# Altium PCB DONUt_v0.0.PcbDoc (part 1 of 2)
Units mm, origin at the board's own origin, x right, y up, seen from the top; angles counter-clockwise.
Board outline 170 x 70 mm, 2 copper layers (Top Layer, Bottom Layer); 266 components, 203 nets, 883 pads, 488 vias.
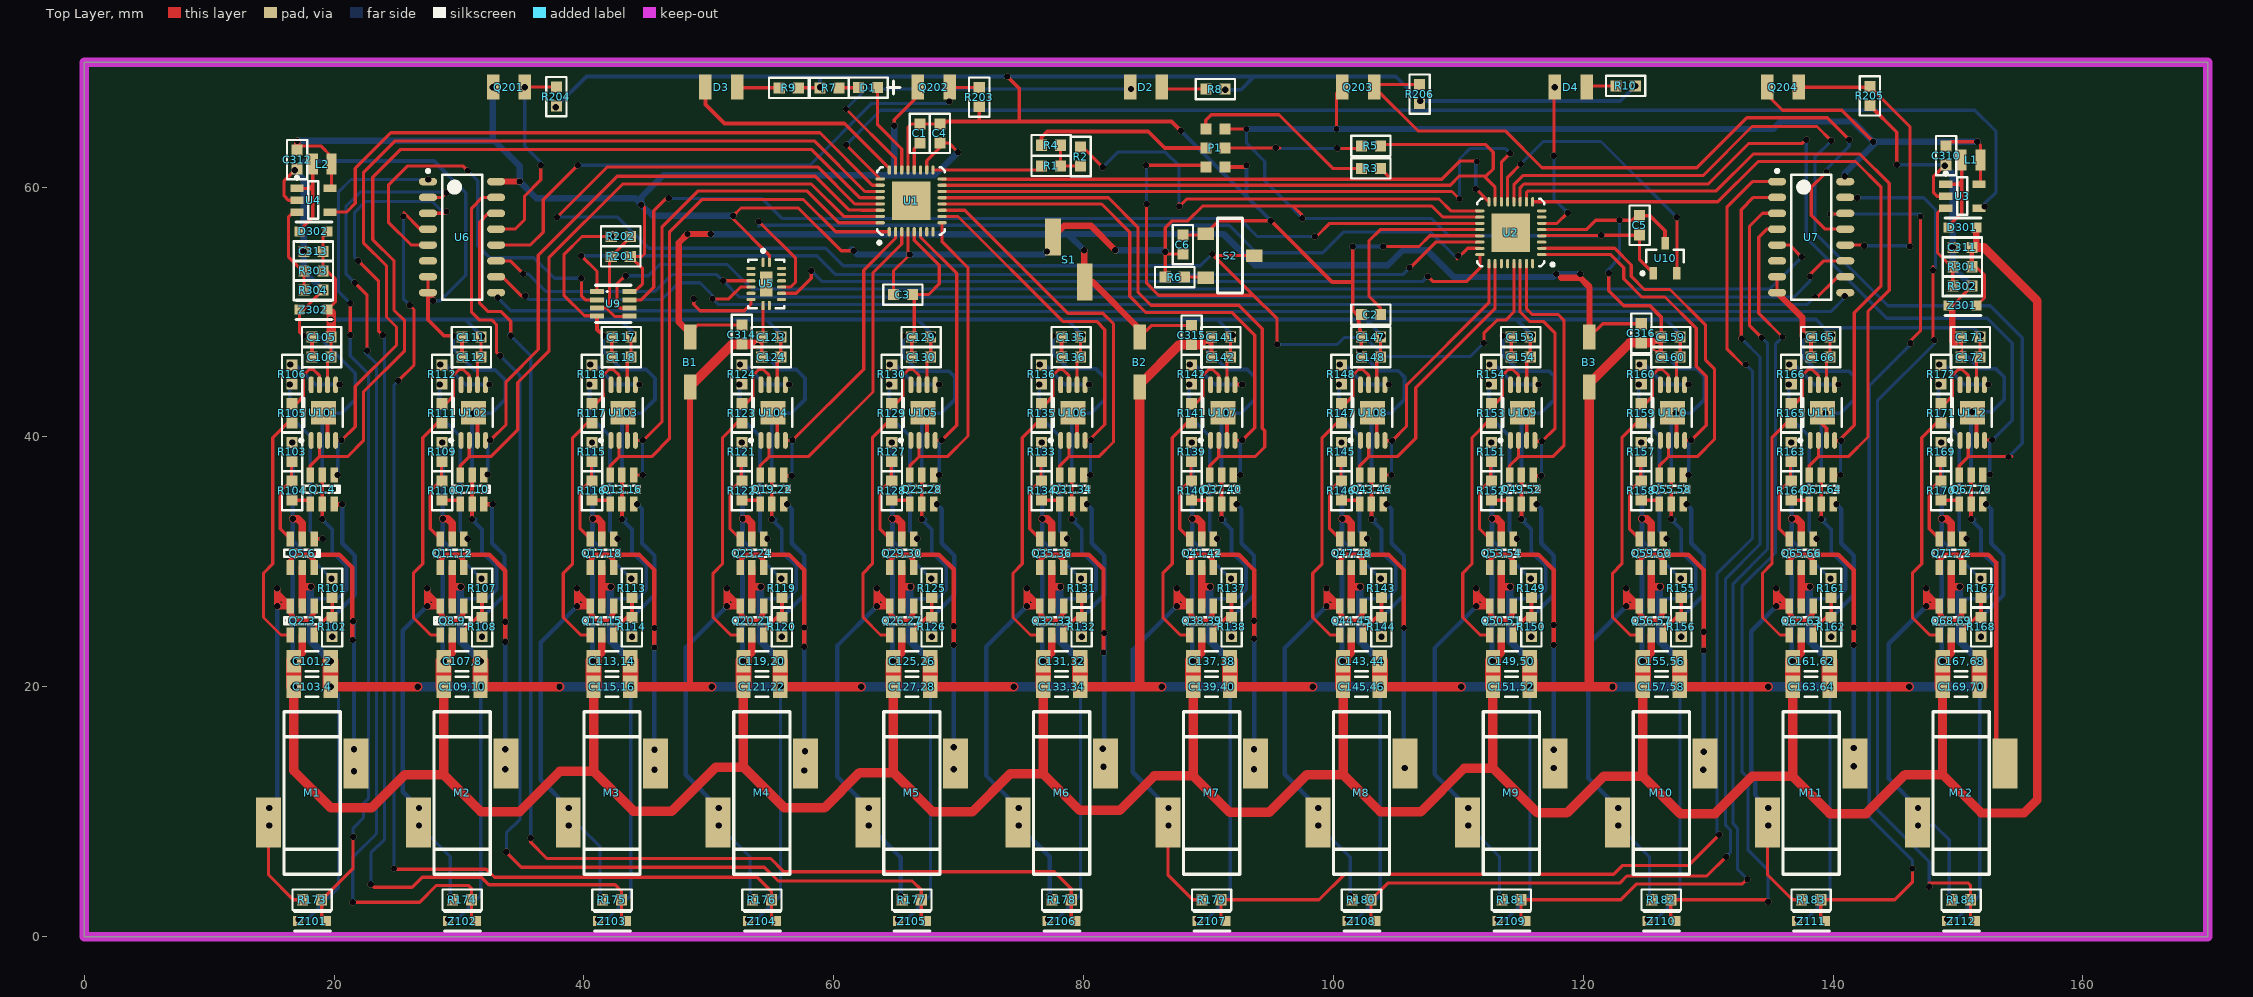
[diagram p0: Top Layer view]
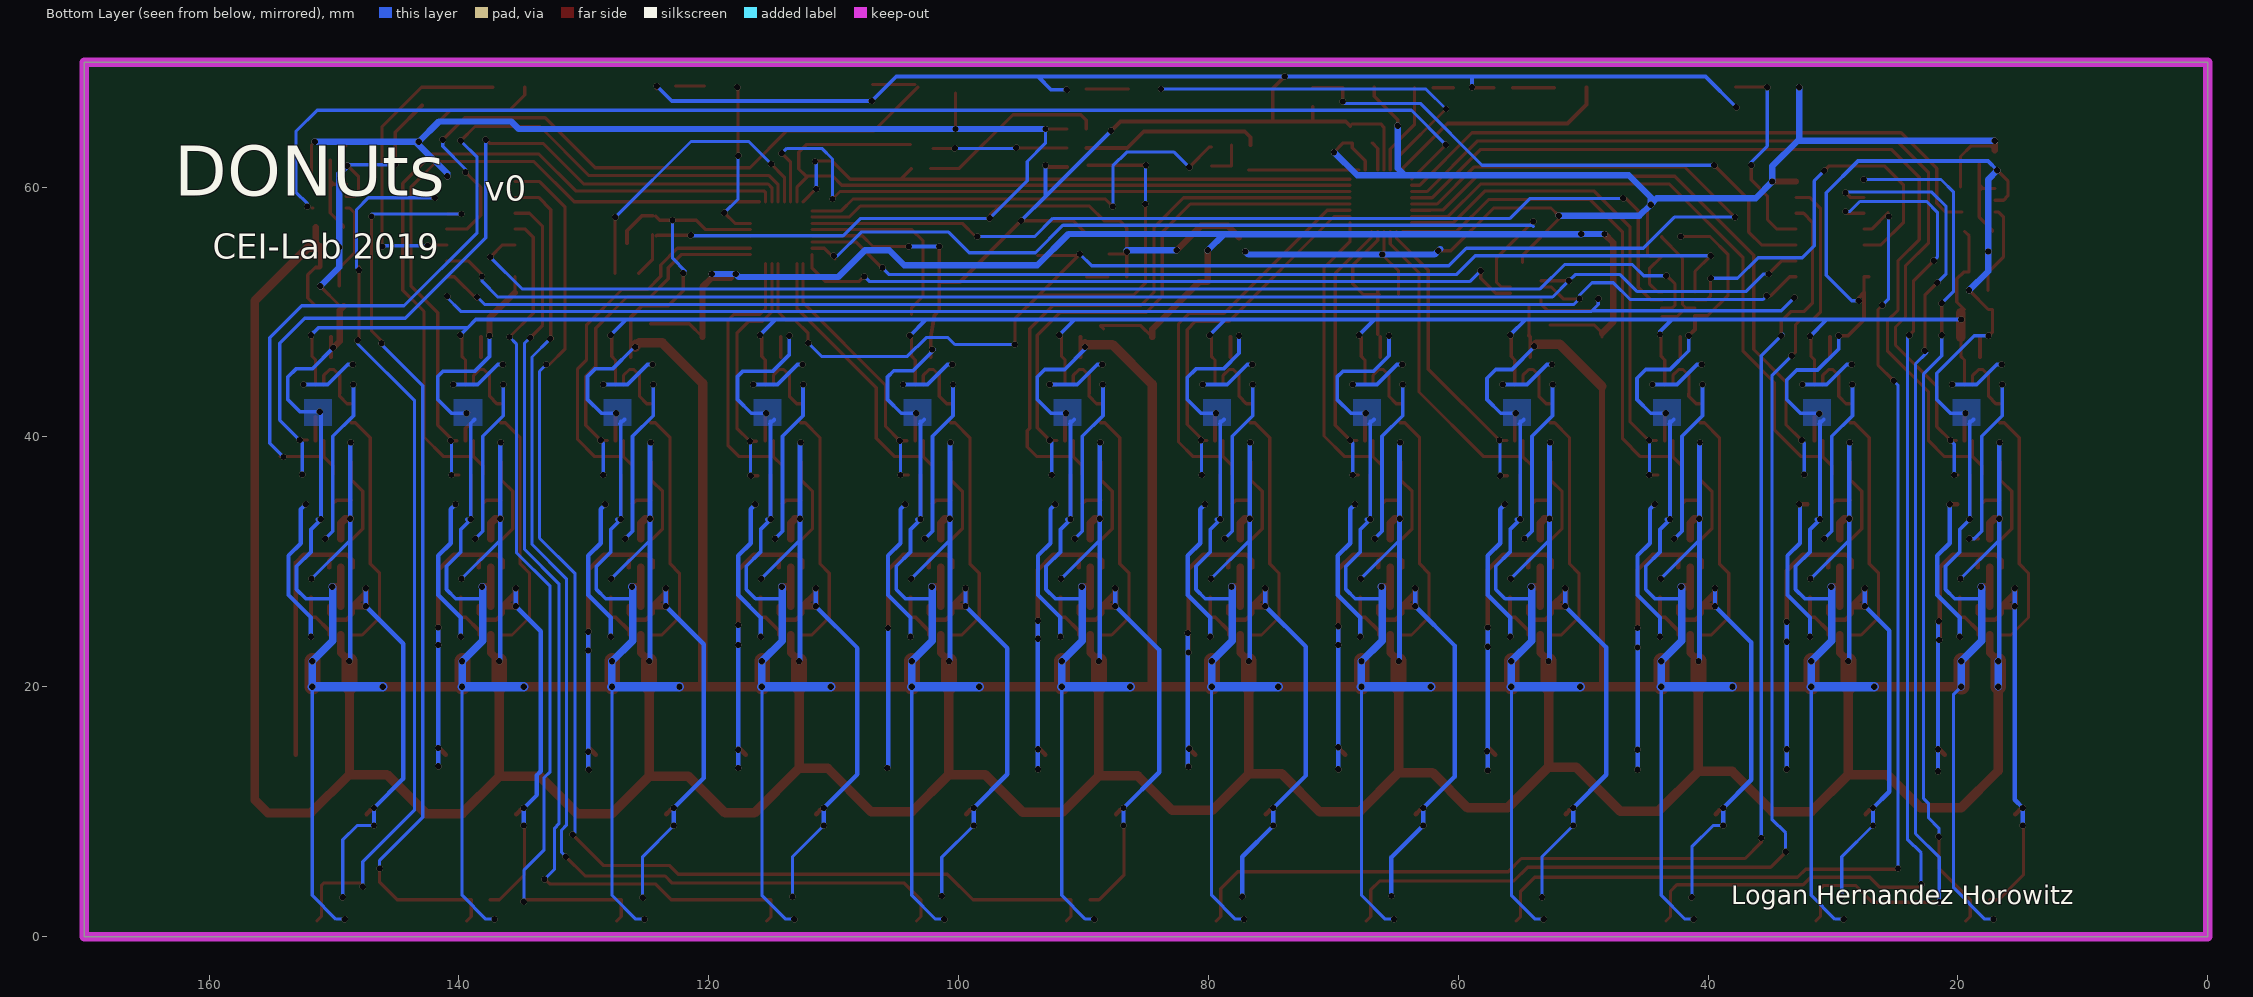
[diagram p1: Bottom Layer view, seen from below]
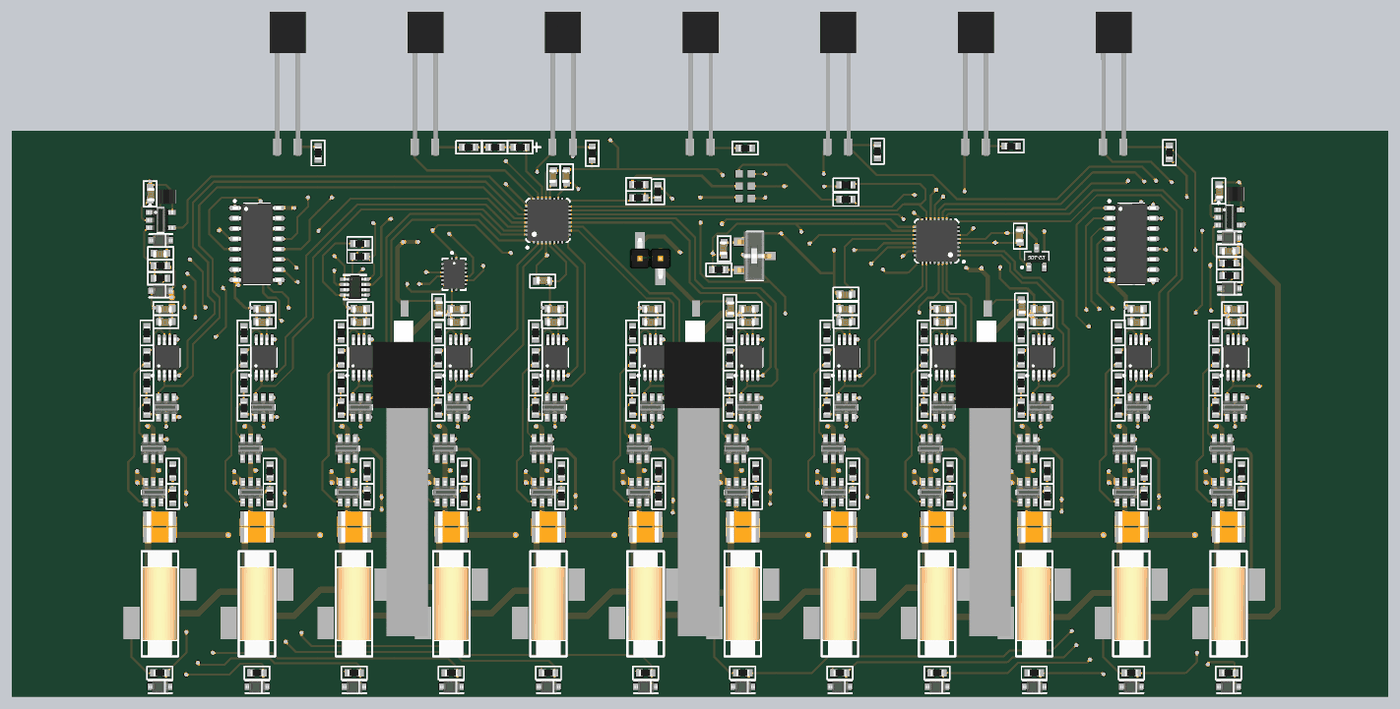
[diagram p3: 3D render of the assembled board from above, using the file's embedded part models]

## Layer stack, top to bottom
Top Solder: solder mask 0.0102, Solder Resist, Dk 3.5
Top Layer: signal copper 0.0356
Dielectric 1: dielectric 0.32, FR-4, Dk 4.8
Bottom Layer: signal copper 0.0356
Bottom Solder: solder mask 0.0102, Solder Resist, Dk 3.5

## Board outline
0,0 0,70 170,70 170,0

## Design rules (kind name [scope] priority, off if disabled: settings)
Clearance [All] p1: gap=0.254 ignorepadtopadclearanceinfootprint=FALSE except(0: Arc-Hole Track-Hole SMDPad-Hole THPad-Hole Via-Hole Fill-Hole Poly-Hole Region-Hole Text-Hole; 0.203: SMDPad-SMDPad; 0.229: Arc-Arc Arc-Track Arc-SMDPad Track-Track Track-SMDPad)
MinimumSolderMaskSliver [All] p1 off: minsoldermaskwidth=0.254
PolygonConnect [All] p1: connectstyle=Direct reliefconductorwidth=0.254 reliefentries=4 polygonreliefangle="90 Angle" airgapwidth=0.254
RoutingVias [All] p1: holewidth=0.711 width=1.27 viastyle="Through Hole" minholewidth=0.711 minwidth=1.27 maxholewidth=0.711 maxwidth=1.27
SilkToSilkClearance [All] p1 off: silktosilkclearance=0.254
SilkToSolderMaskClearance [IsPad] p1 off: minsilkscreentomaskgap=0.254 clearancetoexposedcopper=TRUE
SolderMaskExpansion [All] p1: expansion=0.102
Width [All] p1: maxlimit=1.27 minlimit=0.203 preferedwidth=0.254 minimp=50.000000 maximp=50.000000 favimp=50.000000
27 further rules are at their usual default settings.

## Classes and differential pairs
component class U_comm_sensing: Q201 Q202 Q203 Q204 R201 R202 R203 R204 R205 R206 U5 U6 U7 U9
component class U_epm_control_2: C137,38 C139,40 C141 C142 C143,44 C145,46 C147 C148 C149,50 C151,52 C153 C154 C155,56 C157,58 C159 C160 C161,62 C163,64 C165 C166 C167,68 C169,70 C171 C172 M7 M8 M9 M10 M11 M12 Q37,40 Q38,39 Q41,42 Q43,46 Q44,45 Q47,48 Q49,52 Q50,51 Q53,54 Q55,58 Q56,57 Q59,60 Q61,64 Q62,63 Q65,66 Q67,70 Q68,69 Q71,72 R137 R138 R139 R140 R141 R142 R143 R144 R145 R146 R147 R148 R149 R150 R151 R152 R153 R154 R155 R156 R157 R158 R159 R160 R161 R162 R163 R164 R165 R166 R167 R168 R169 R170 R171 R172 R179 R180 R181 R182 R183 R184 U107 U108 U109 U110 U111 U112 Z107 Z108 Z109 Z110 Z111 Z112
component class U_uC: C1 C2 C3 C4 C5 C6 D1 D2 D3 D4 P1 R1 R2 R3 R4 R5 R6 R7 R8 R9 R10 S2 U1 U2 U10
component class U_power: B1 B2 B3 C310 C311 C312 C313 C314 C315 C316 D301 D302 L1 L2 R301 R302 R303 R304 S1 U3 U4 Z301 Z302
component class U_epm_control_1: C101,2 C103,4 C105 C106 C107,8 C109,10 C111 C112 C113,14 C115,16 C117 C118 C119,20 C121,22 C123 C124 C125,26 C127,28 C129 C130 C131,32 C133,34 C135 C136 M1 M2 M3 M4 M5 M6 Q1,4 Q2,3 Q5,6 Q7,10 Q8,9 Q11,12 Q13,16 Q14,15 Q17,18 Q19,22 Q20,21 Q23,24 Q25,28 Q26,27 Q29,30 Q31,34 Q32,33 Q35,36 R101 R102 R103 R104 R105 R106 R107 R108 R109 R110 R111 R112 R113 R114 R115 R116 R117 R118 R119 R120 R121 R122 R123 R124 R125 R126 R127 R128 R129 R130 R131 R132 R133 R134 R135 R136 R173 R174 R175 R176 R177 R178 U101 U102 U103 U104 U105 U106 Z101 Z102 Z103 Z104 Z105 Z106

## Components (designator, comment, footprint, x,y, rotation, side; value= is the part's Value field where it differs from the comment)
B1 "Batt" BATT_PADS 48.5,46 r0 top locked
B2 "Batt" BATT_PADS 84.5,46 r0 top locked
B3 "Batt" BATT_PADS 120.5,46 r0 top locked
C1 "Cap" SMD0603_cap 66.895,64.3 r270 top value=100n
C2 "Cap" SMD0603_cap 103,49.8 r0 top value=100n
C3 "Cap" SMD0603_cap 65.544,51.4 r180 top value=100n
C4 "Cap" SMD0603_cap 68.495,64.3 r270 top value=100n
C5 "Cap" SMD0603_cap 124.512,56.95 r270 top value=100n
C6 "Cap" SMD0603_cap 87.95,55.4 r270 top value=100n
C101,2 "Dicap" dicap_smd_1206 18.25,22.05 r180 top value=22u
C103,4 "Dicap" dicap_smd_1206 18.25,20 r180 top value=22u
C105 "Cap" SMD0603_cap 19,48 r0 top value=100n
C106 "Cap" SMD0603_cap 19,46.4 r0 top value=4.7u
C107,8 "Dicap" dicap_smd_1206 30.25,22.05 r180 top value=22u
C109,10 "Dicap" dicap_smd_1206 30.25,20 r180 top value=22u
C111 "Cap" SMD0603_cap 31,48 r0 top value=100n
C112 "Cap" SMD0603_cap 31,46.4 r0 top value=4.7u
C113,14 "Dicap" dicap_smd_1206 42.25,22.05 r180 top value=22u
C115,16 "Dicap" dicap_smd_1206 42.25,20 r180 top value=22u
C117 "Cap" SMD0603_cap 43,48 r0 top value=100n
C118 "Cap" SMD0603_cap 43,46.4 r0 top value=4.7u
C119,20 "Dicap" dicap_smd_1206 54.25,22.05 r180 top value=22u
C121,22 "Dicap" dicap_smd_1206 54.25,20 r180 top value=22u
C123 "Cap" SMD0603_cap 55,48 r0 top value=100n
C124 "Cap" SMD0603_cap 55,46.4 r0 top value=4.7u
C125,26 "Dicap" dicap_smd_1206 66.25,22.05 r180 top value=22u
C127,28 "Dicap" dicap_smd_1206 66.25,20 r180 top value=22u
C129 "Cap" SMD0603_cap 67,48 r0 top value=100n
C130 "Cap" SMD0603_cap 67,46.4 r0 top value=4.7u
C131,32 "Dicap" dicap_smd_1206 78.25,22.05 r180 top value=22u
C133,34 "Dicap" dicap_smd_1206 78.25,20 r180 top value=22u
C135 "Cap" SMD0603_cap 79,48 r0 top value=100n
C136 "Cap" SMD0603_cap 79,46.4 r0 top value=4.7u
C137,38 "Dicap" dicap_smd_1206 90.25,22.05 r180 top value=22u
C139,40 "Dicap" dicap_smd_1206 90.25,20 r180 top value=22u
C141 "Cap" SMD0603_cap 91,48 r0 top value=100n
C142 "Cap" SMD0603_cap 91,46.4 r0 top value=4.7u
C143,44 "Dicap" dicap_smd_1206 102.25,22.05 r180 top value=22u
C145,46 "Dicap" dicap_smd_1206 102.25,20 r180 top value=22u
C147 "Cap" SMD0603_cap 103,48 r0 top value=100n
C148 "Cap" SMD0603_cap 103,46.4 r0 top value=4.7u
C149,50 "Dicap" dicap_smd_1206 114.25,22.05 r180 top value=22u
C151,52 "Dicap" dicap_smd_1206 114.25,20 r180 top value=22u
C153 "Cap" SMD0603_cap 115,48 r0 top value=100n
C154 "Cap" SMD0603_cap 115,46.4 r0 top value=4.7u
C155,56 "Dicap" dicap_smd_1206 126.25,22.05 r180 top value=22u
C157,58 "Dicap" dicap_smd_1206 126.25,20 r180 top value=22u
C159 "Cap" SMD0603_cap 127,48 r0 top value=100n
C160 "Cap" SMD0603_cap 127,46.4 r0 top value=4.7u
C161,62 "Dicap" dicap_smd_1206 138.25,22.05 r180 top value=22u
C163,64 "Dicap" dicap_smd_1206 138.25,20 r180 top value=22u
C165 "Cap" SMD0603_cap 139,48 r0 top value=100n
C166 "Cap" SMD0603_cap 139,46.4 r0 top value=4.7u
C167,68 "Dicap" dicap_smd_1206 150.25,22.05 r180 top value=22u
C169,70 "Dicap" dicap_smd_1206 150.25,20 r180 top value=22u
C171 "Cap" SMD0603_cap 151,48 r0 top value=100n
C172 "Cap" SMD0603_cap 151,46.4 r0 top value=4.7u
C310 "Cap" SMD0603_cap 149.05,62.525 r90 top value=4.7u
C311 "Cap" SMD0603_cap 150.35,55.175 r0 top value=4.7u
C312 "Cap" SMD0603_cap 17.05,62.2 r90 top value=4.7u
C313 "Cap" SMD0603_cap 18.35,54.85 r0 top value=4.7u
C314 "Cap" SMD0603_cap 52.65,48.2 r90 top value=4.7u
C315 "Cap" SMD0603_cap 88.65,48.15 r90 top value=4.7u
C316 "Cap" SMD0603_cap 124.65,48.3 r90 top value=4.7u
D1 "LED" "SMD0603 POLARIZED" 62.75,67.962 r180 top
D2 "IR_LED" smd_phototrans 85,68 r0 top
D3 "IR_LED" smd_phototrans 51,68 r0 top
D4 "IR_LED" smd_phototrans 119,68 r0 top
D301 "Shottky" sod-323f 150.35,56.775 r0 top
D302 "Shottky" sod-323f 18.35,56.45 r0 top
L1 "Inductor" smd_0806 151.05,62.175 r180 top value=4.7u
L2 "Inductor" smd_0806 19.05,61.85 r180 top value=4.7u
M1 "EPM" 40AWG_EPM 18.25,11.5 r0 top locked
M2 "EPM" 40AWG_EPM 30.25,11.5 r0 top locked
M3 "EPM" 40AWG_EPM 42.25,11.5 r0 top locked
M4 "EPM" 40AWG_EPM 54.25,11.5 r0 top locked
M5 "EPM" 40AWG_EPM 66.25,11.5 r0 top locked
M6 "EPM" 40AWG_EPM 78.25,11.5 r0 top locked
M7 "EPM" 40AWG_EPM 90.25,11.5 r0 top locked
M8 "EPM" 40AWG_EPM 102.25,11.5 r0 top locked
M9 "EPM" 40AWG_EPM 114.25,11.5 r0 top locked
M10 "EPM" 40AWG_EPM 126.25,11.5 r0 top locked
M11 "EPM" 40AWG_EPM 138.25,11.5 r0 top locked
M12 "EPM" 40AWG_EPM 150.25,11.5 r0 top locked
P1 "ICSP Header" icsp_pads 90.55,63.9 r0 top
Q1,4 "SI3292" sot23-6l 19.05,35.8 r270 top
Q2,3 "DMG6602" sot23-6l 17.45,25.3 r90 top
Q5,6 "DMG6602" sot23-6l 17.45,30.7 r270 top
Q7,10 "SI3292" sot23-6l 31.05,35.8 r270 top
Q8,9 "DMG6602" sot23-6l 29.45,25.3 r90 top
Q11,12 "DMG6602" sot23-6l 29.45,30.7 r270 top
Q13,16 "SI3292" sot23-6l 43.05,35.8 r270 top
Q14,15 "DMG6602" sot23-6l 41.45,25.3 r90 top
Q17,18 "DMG6602" sot23-6l 41.45,30.7 r270 top
Q19,22 "SI3292" sot23-6l 55.05,35.8 r270 top
Q20,21 "DMG6602" sot23-6l 53.45,25.3 r90 top
Q23,24 "DMG6602" sot23-6l 53.45,30.7 r270 top
Q25,28 "SI3292" sot23-6l 67.05,35.8 r270 top
Q26,27 "DMG6602" sot23-6l 65.45,25.3 r90 top
Q29,30 "DMG6602" sot23-6l 65.45,30.7 r270 top
Q31,34 "SI3292" sot23-6l 79.05,35.8 r270 top
Q32,33 "DMG6602" sot23-6l 77.45,25.3 r90 top
Q35,36 "DMG6602" sot23-6l 77.45,30.7 r270 top
Q37,40 "SI3292" sot23-6l 91.05,35.8 r270 top
Q38,39 "DMG6602" sot23-6l 89.45,25.3 r90 top
Q41,42 "DMG6602" sot23-6l 89.45,30.7 r270 top
Q43,46 "SI3292" sot23-6l 103.05,35.8 r270 top
Q44,45 "DMG6602" sot23-6l 101.45,25.3 r90 top
Q47,48 "DMG6602" sot23-6l 101.45,30.7 r270 top
Q49,52 "SI3292" sot23-6l 115.05,35.8 r270 top
Q50,51 "DMG6602" sot23-6l 113.45,25.3 r90 top
Q53,54 "DMG6602" sot23-6l 113.45,30.7 r270 top
Q55,58 "SI3292" sot23-6l 127.05,35.8 r270 top
Q56,57 "DMG6602" sot23-6l 125.45,25.3 r90 top
Q59,60 "DMG6602" sot23-6l 125.45,30.7 r270 top
Q61,64 "SI3292" sot23-6l 139.05,35.8 r270 top
Q62,63 "DMG6602" sot23-6l 137.45,25.3 r90 top
Q65,66 "DMG6602" sot23-6l 137.45,30.7 r270 top
Q67,70 "SI3292" sot23-6l 151.05,35.8 r270 top
Q68,69 "DMG6602" sot23-6l 149.45,25.3 r90 top
Q71,72 "DMG6602" sot23-6l 149.45,30.7 r270 top
Q201 "PHOTOTRANS" smd_phototrans 34,68 r0 top
Q202 "PHOTOTRANS" smd_phototrans 68,68 r0 top
Q203 "PHOTOTRANS" smd_phototrans 102,68 r0 top
Q204 "PHOTOTRANS" smd_phototrans 136,68 r0 top
R1 "Res" SMD0603 77.4,61.7 r180 top value=0
R2 "Res" SMD0603 79.762,62.45 r270 top value=0
R3 "Res" SMD0603 103,61.5 r0 top value=330
R4 "Res" SMD0603 77.4,63.35 r0 top value=330
R5 "Res" SMD0603 103,63.3 r0 top value=330
R6 "Res" SMD0603 87.3,52.8 r0 top value=220k
R7 "Res" SMD0603 59.65,67.95 r180 top value=1k
R8 "Res" SMD0603 90.55,67.85 r180 top value=330
R9 "Res" SMD0603 56.4,67.95 r180 top value=330
R10 "Res" SMD0603 123.4,68.1 r180 top value=330
R101 "Res" SMD0603 19.85,27.9 r90 top value=5.1K
R102 "Res" SMD0603 19.85,24.8 r90 top value=5.1K
R103 "Res" SMD0603 16.65,38.8 r90 top value=5.1K
R104 "Res" SMD0603 16.65,35.7 r90 top value=5.1K
R105 "Res" SMD0603 16.65,41.9 r90 top value=51
R106 "Res" SMD0603 16.65,45 r90 top value=51
R107 "Res" SMD0603 31.85,27.9 r90 top value=5.1K
R108 "Res" SMD0603 31.85,24.8 r90 top value=5.1K
R109 "Res" SMD0603 28.65,38.8 r90 top value=5.1K
R110 "Res" SMD0603 28.65,35.7 r90 top value=5.1K
R111 "Res" SMD0603 28.65,41.9 r90 top value=51
R112 "Res" SMD0603 28.65,45 r90 top value=51
R113 "Res" SMD0603 43.85,27.9 r90 top value=5.1K
R114 "Res" SMD0603 43.85,24.8 r90 top value=5.1K
R115 "Res" SMD0603 40.65,38.8 r90 top value=5.1K
R116 "Res" SMD0603 40.65,35.7 r90 top value=5.1K
R117 "Res" SMD0603 40.65,41.9 r90 top value=51
R118 "Res" SMD0603 40.65,45 r90 top value=51
R119 "Res" SMD0603 55.85,27.9 r90 top value=5.1K
R120 "Res" SMD0603 55.85,24.8 r90 top value=5.1K
R121 "Res" SMD0603 52.65,38.8 r90 top value=5.1K
R122 "Res" SMD0603 52.65,35.7 r90 top value=5.1K
R123 "Res" SMD0603 52.65,41.9 r90 top value=51
R124 "Res" SMD0603 52.65,45 r90 top value=51
R125 "Res" SMD0603 67.85,27.9 r90 top value=5.1K
R126 "Res" SMD0603 67.85,24.8 r90 top value=5.1K
R127 "Res" SMD0603 64.65,38.8 r90 top value=5.1K
R128 "Res" SMD0603 64.65,35.7 r90 top value=5.1K
R129 "Res" SMD0603 64.65,41.9 r90 top value=51
R130 "Res" SMD0603 64.65,45 r90 top value=51
R131 "Res" SMD0603 79.85,27.9 r90 top value=5.1K
R132 "Res" SMD0603 79.85,24.8 r90 top value=5.1K
R133 "Res" SMD0603 76.65,38.8 r90 top value=5.1K
R134 "Res" SMD0603 76.65,35.7 r90 top value=5.1K
R135 "Res" SMD0603 76.65,41.9 r90 top value=51
R136 "Res" SMD0603 76.65,45 r90 top value=51
R137 "Res" SMD0603 91.85,27.9 r90 top value=5.1K
R138 "Res" SMD0603 91.85,24.8 r90 top value=5.1K
R139 "Res" SMD0603 88.65,38.8 r90 top value=5.1K
R140 "Res" SMD0603 88.65,35.7 r90 top value=5.1K
R141 "Res" SMD0603 88.65,41.9 r90 top value=51
R142 "Res" SMD0603 88.65,45 r90 top value=51
R143 "Res" SMD0603 103.85,27.9 r90 top value=5.1K
R144 "Res" SMD0603 103.85,24.8 r90 top value=5.1K
R145 "Res" SMD0603 100.65,38.8 r90 top value=5.1K
R146 "Res" SMD0603 100.65,35.7 r90 top value=5.1K
R147 "Res" SMD0603 100.65,41.9 r90 top value=51
R148 "Res" SMD0603 100.65,45 r90 top value=51
R149 "Res" SMD0603 115.85,27.9 r90 top value=5.1K
R150 "Res" SMD0603 115.85,24.8 r90 top value=5.1K
R151 "Res" SMD0603 112.65,38.8 r90 top value=5.1K
R152 "Res" SMD0603 112.65,35.7 r90 top value=5.1K
R153 "Res" SMD0603 112.65,41.9 r90 top value=51
R154 "Res" SMD0603 112.65,45 r90 top value=51
R155 "Res" SMD0603 127.85,27.9 r90 top value=5.1K
R156 "Res" SMD0603 127.85,24.8 r90 top value=5.1K
R157 "Res" SMD0603 124.65,38.8 r90 top value=5.1K
R158 "Res" SMD0603 124.65,35.7 r90 top value=5.1K
R159 "Res" SMD0603 124.65,41.9 r90 top value=51
R160 "Res" SMD0603 124.65,45 r90 top value=51
R161 "Res" SMD0603 139.85,27.9 r90 top value=5.1K
R162 "Res" SMD0603 139.85,24.8 r90 top value=5.1K
R163 "Res" SMD0603 136.65,38.8 r90 top value=5.1K
R164 "Res" SMD0603 136.65,35.7 r90 top value=5.1K
R165 "Res" SMD0603 136.65,41.9 r90 top value=51
R166 "Res" SMD0603 136.65,45 r90 top value=51
R167 "Res" SMD0603 151.85,27.9 r90 top value=5.1K
R168 "Res" SMD0603 151.85,24.8 r90 top value=5.1K
R169 "Res" SMD0603 148.65,38.8 r90 top value=5.1K
R170 "Res" SMD0603 148.65,35.7 r90 top value=5.1K
R171 "Res" SMD0603 148.65,41.9 r90 top value=51
R172 "Res" SMD0603 148.65,45 r90 top value=51
R173 "Res" SMD0603 18.25,2.95 r180 top value=220K
R174 "Res" SMD0603 30.25,2.95 r180 top value=220K
R175 "Res" SMD0603 42.25,2.95 r180 top value=220K
R176 "Res" SMD0603 54.25,2.95 r180 top value=220K
R177 "Res" SMD0603 66.25,2.95 r180 top value=220K
R178 "Res" SMD0603 78.25,2.95 r180 top value=220K
R179 "Res" SMD0603 90.25,2.95 r180 top value=220K
R180 "Res" SMD0603 102.25,2.95 r180 top value=220K
R181 "Res" SMD0603 114.25,2.95 r180 top value=220K
R182 "Res" SMD0603 126.25,2.95 r180 top value=220K
R183 "Res" SMD0603 138.25,2.95 r180 top value=220K
R184 "Res" SMD0603 150.25,2.95 r180 top value=220K
R201 "Res" SMD0603 42.95,54.45 r0 top value=220k
R202 "Res" SMD0603 42.95,56.05 r180 top value=220k
R203 "Res" SMD0603 71.65,67.2 r270 top value=1k
R204 "Res" SMD0603 37.8,67.25 r270 top value=1k
R205 "Res" SMD0603 142.95,67.3 r270 top value=1k
R206 "Res" SMD0603 106.9,67.45 r270 top value=1k
R301 "Res" SMD0603 150.35,53.625 r0 top value=100k
R302 "Res" SMD0603 150.35,52.075 r180 top value=5.1k
R303 "Res" SMD0603 18.35,53.3 r0 top value=100k
R304 "Res" SMD0603 18.35,51.75 r180 top value=5.1k
S1 "Header_smd-2x1" header_smd-2x1 78.825,54.2 r0 top
S2 "Switch_SPDT" Switch_SPDT 90.65,55.15 r270 top
U1 "ATMega328P_vqfn" VQFN-32 66.2,58.9 r90 top
U2 "ATMega328P_vqfn" VQFN-32 114.2,56.35 r180 top
U3 "AP3012" SOT23-5Lead 150.35,59.275 r0 top
U4 "AP3012" SOT23-5Lead 18.35,58.95 r0 top
U5 "74HC4060" dhvqfn-16 54.6,52.25 r0 top
U6 "MC74HC151A" soic-16 30.25,56 r0 top
U7 "MC74HC151A" soic-16 138.25,56 r0 top
U9 "TLV3492" SOT23-8 42.35,50.65 r270 top
U10 "MAX6101" sot23 126.55,54.3 r0 top
U101 "LM5111-1" TSSOP-8 19.15,41.95 r90 top
U102 "LM5111-1" TSSOP-8 31.15,41.95 r90 top
U103 "LM5111-1" TSSOP-8 43.15,41.95 r90 top
U104 "LM5111-1" TSSOP-8 55.15,41.95 r90 top
U105 "LM5111-1" TSSOP-8 67.15,41.95 r90 top
U106 "LM5111-1" TSSOP-8 79.15,41.95 r90 top
U107 "LM5111-1" TSSOP-8 91.15,41.95 r90 top
U108 "LM5111-1" TSSOP-8 103.15,41.95 r90 top
U109 "LM5111-1" TSSOP-8 115.15,41.95 r90 top
U110 "LM5111-1" TSSOP-8 127.15,41.95 r90 top
U111 "LM5111-1" TSSOP-8 139.15,41.95 r90 top
U112 "LM5111-1" TSSOP-8 151.15,41.95 r90 top
Z101 "Zener" SOD-323F 18.25,1.25 r0 top value=3v3
Z102 "Zener" SOD-323F 30.25,1.25 r0 top value=3v3
Z103 "Zener" SOD-323F 42.25,1.25 r0 top value=3v3
Z104 "Zener" SOD-323F 54.25,1.25 r0 top value=3v3
Z105 "Zener" SOD-323F 66.25,1.25 r0 top value=3v3
Z106 "Zener" SOD-323F 78.25,1.25 r0 top value=3v3
Z107 "Zener" SOD-323F 90.25,1.25 r0 top value=3v3
Z108 "Zener" SOD-323F 102.25,1.25 r0 top value=3v3
Z109 "Zener" SOD-323F 114.25,1.25 r0 top value=3v3
Z110 "Zener" SOD-323F 126.25,1.25 r0 top value=3v3
Z111 "Zener" SOD-323F 138.25,1.25 r0 top value=3v3
Z112 "Zener" SOD-323F 150.25,1.25 r0 top value=3v3
Z301 "Zener" SOD-323F 150.35,50.525 r0 top value=30V
Z302 "Zener" SOD-323F 18.35,50.2 r0 top value=16V

## Footprints (in the part's own frame and the unit in brackets; to place one, negate y for a bottom-side part, rotate by r counter-clockwise, add the part's x,y. Pads: shape width x height; smd on the part's side, far side on the other; paste and mask are expansions set on the pad)
40AWG_EPM [mm]
  rect 2x4 smd paste+0 mask+0: 1(3.5,2.35) 2(-3.5,-2.35)
  silkscreen extent -2.25,-6.5 2.25,6.5, body extent -2.1,-6.5 2.1,6.5, height 6.69
BATT_PADS [mm]
  rect 1x2 smd paste+0 mask+0: 1(0,2) 2(0,-2)
  body extent -3.95,-38.5 3.15,0.5, height 14
dhvqfn-16 [mm] "QFN, 16-Leads, Body 2.50x3.50mm, Pitch 0.50mm, Thermal Pad 1.00x2.00mm, IPC Medium Density"
  oval 0.25x0.75 smd: 1(-0.25,1.725) 8(-0.25,-1.725) 9(0.25,-1.725) 16(0.25,1.725)
  oval 0.75x0.25 smd: 2(-1.225,1.25) 3(-1.225,0.75) 4(-1.225,0.25) 5(-1.225,-0.25) 6(-1.225,-0.75) 7(-1.225,-1.25) 10(1.225,-1.25) 11(1.225,-0.75) 12(1.225,-0.25) 13(1.225,0.25) 14(1.225,0.75) 15(1.225,1.25)
  rect 1x2 smd: 17(0,0)
  silkscreen extent -1.45,-1.95 1.45,2.77, body extent -1.3,-1.8 1.3,1.8, height 1
dicap_smd_1206 [mm]
  rect 1.15x1.8 smd: 1(-1.475,0) 2(1.475,0)
  silkscreen extent -0.5,-0.8 0.5,0.8, body extent -1.6,-0.9 1.6,0.9, height 3.6
header_smd-2x1 [mm]
  rect 1.27x2.96 smd paste+0 mask+0: 1(-1.27,1.8) 2(1.27,-1.8)
  body extent -2.54,-2.54 2.54,2.54, height 10.16
icsp_pads [mil]
  rect 35x35 smd: 1(-30,30) 2(30,30) 3(-30,-30) 4(30,-30) 5(-30,-90) 6(30,-90)
SMD0603 [mil]
  rect 35x35 smd: 1(-30,0) 2(30,0)
  silkscreen extent -62,-32 62,32, body extent -31,-16 32,16, height 18
"SMD0603 POLARIZED" [mil]
  rect 35x35 smd: 1(-30,0) 2(30,0)
  silkscreen extent -100,-32 62,32, body extent -31,-16 32,16, height 18
SMD0603_cap [mil]
  rect 35x35 smd: 1(-30,0) 2(30,0)
  silkscreen extent -62,-32 62,32, body extent -37,-22 30,14, height 35
smd_0806 [mm]
  rect 0.8x1.7 smd paste+0 mask+0: 1(-0.75,0) 2(0.75,0)
  body extent -1.1,-0.9 1.1,0.9, height 1
smd_phototrans [mm]
  rect 1x2 smd paste+0 mask+0: 1(-1.27,0) 2(1.27,0)
  body extent -2.17,-1.09 2.27,16.69, height 4
sod-323f [mm]
  rect 0.8x0.8 smd: A(-1.12,0) K(1.12,0)
  silkscreen extent -1.4,-0.8 1.47,0.75, body extent -1.38,-0.77 1.48,0.73, height 1.12
SOD-323F [mm]
  rect 0.8x0.8 smd: A(-1.12,0) K(1.12,0)
  silkscreen extent -1.4,-0.8 1.47,0.75, body extent -1.38,-0.77 1.48,0.73, height 1.12
soic-16 [mm] "SOIC, 16-Leads, Body 9.90x3.90mm, Pitch 1.27mm, IPC Medium Density"
  oval 1.45x0.6 smd: 1(-2.725,4.445) 2(-2.725,3.175) 3(-2.725,1.905) 4(-2.725,0.635) 5(-2.725,-0.635) 6(-2.725,-1.905) 7(-2.725,-3.175) 8(-2.725,-4.445) 9(2.725,-4.445) 10(2.725,-3.175) 11(2.725,-1.905) 12(2.725,-0.635) 13(2.725,0.635) 14(2.725,1.905) 15(2.725,3.175) 16(2.725,4.445)
  silkscreen extent -2.85,-5 1.6,5.42, body extent -3,-5 3,5, height 1.75
sot23 [mm] "SOT23, 3-Leads, Body 2.90x2.45mm, Pitch 0.95mm, IPC Medium Density"
  rect 0.6x1 smd: 1(-0.95,-1.2) 2(0.95,-1.2) 3(0,1.2)
  silkscreen extent -1.92,-1.32 1.5,0.7, body extent -1.51,-1.26 1.49,1.29, height 1
SOT23-5Lead [mm] "SOT23, 5-Leads, Body 2.95x2.80mm, Pitch 0.95mm, IPC Medium Density"
  rect 1.05x0.6 smd: 1(-1.325,0.95) 2(-1.325,0) 3(-1.325,-0.95) 4(1.325,-0.95) 5(1.325,0.95)
  silkscreen extent -1.45,-1.5 0.4,1.92, body extent -1.66,-1.5 1.55,1.5, height 0.92
sot23-6l [mm] "ESDA6V1BC6"
  rect 1.2x0.6 smd: 1(-1.15,0.95) 2(-1.15,0) 3(-1.15,-0.95) 4(1.15,-0.95) 5(1.15,0) 6(1.15,0.95)
  silkscreen extent -0.28,-1.43 0.28,1.43, body extent -1.42,-1.51 1.42,1.41, height 1.1
SOT23-8 [mm]
  rect 0.4x1.1 smd: 1(-0.975,-1.3) 2(-0.325,-1.3) 3(0.325,-1.3) 4(0.975,-1.3) 5(0.975,1.3) 6(0.325,1.3) 7(-0.325,1.3) 8(-0.975,1.3)
  silkscreen extent -1.5,-1.4 1.5,1.4, body extent -1.47,-1.4 1.47,1.4, height 1.2
Switch_SPDT [mm]
  rect 1x1.3 smd: 1(-1.118,-0.864) 2(0.635,3.023) 3(2.388,-0.864)
  silkscreen extent -2.36,0.08 3.63,2.08, body extent -2.35,-1.09 3.65,3.11, height 2.48
TSSOP-8 [mm] "TSOP, 8-Leads, Body 3.00x3.00mm, Pitch 0.65mm, Thermal Pad 2.00x1.88mm, IPC Medium Density"
  oval 1.35x0.4 smd: 1(-2.225,0.975) 2(-2.225,0.325) 3(-2.225,-0.325) 4(-2.225,-0.975) 5(2.225,-0.975) 6(2.225,-0.325) 7(2.225,0.325) 8(2.225,0.975)
  rect 1.88x2 smd: 9(0,0)
  silkscreen extent -2.35,-1.55 1.15,1.9, body extent -2.45,-1.55 2.45,1.55, height 1.1
VQFN-32 [mm] "QFN, 32-Leads, Body 5.00x5.00mm, Pitch 0.50mm, Thermal Pad 3.10x3.10mm, IPC Medium Density"
  oval 0.75x0.25 smd: 1(-2.475,1.75) 2(-2.475,1.25) 3(-2.475,0.75) 4(-2.475,0.25) 5(-2.475,-0.25) 6(-2.475,-0.75) 7(-2.475,-1.25) 8(-2.475,-1.75) 17(2.475,-1.75) 18(2.475,-1.25) 19(2.475,-0.75) 20(2.475,-0.25) 21(2.475,0.25) 22(2.475,0.75) 23(2.475,1.25) 24(2.475,1.75)
  oval 0.25x0.75 smd: 9(-1.75,-2.475) 10(-1.25,-2.475) 11(-0.75,-2.475) 12(-0.25,-2.475) 13(0.25,-2.475) 14(0.75,-2.475) 15(1.25,-2.475) 16(1.75,-2.475) 25(1.75,2.475) 26(1.25,2.475) 27(0.75,2.475) 28(0.25,2.475) 29(-0.25,2.475) 30(-0.75,2.475) 31(-1.25,2.475) 32(-1.75,2.475)
  rect 3.1x3.1 smd: 33(0,0)
  silkscreen extent -3.47,-2.7 2.7,2.7, body extent -2.55,-2.55 2.55,2.55, height 0.9

## Part data
C1 C2 C3 C4 C5 C6 C105 C106 C111 C112 C117 C118 C123 C124 C129 C130 C135 C136 C141 C142 C147 C148 C153 C154 C159 C160 C165 C166 C171 C172 C310 C311 C312 C313 C314 C315 C316: library part "Capacitor Ceramic", "Ceramic Chip Capacitor"
R1 R2 R3 R4 R5 R6 R7 R8 R9 R10 R101 R102 R103 R104 R105 R106 R107 R108 R109 R110 R111 R112 R113 R114 R115 R116 R117 R118 R119 R120 R121 R122 R123 R124 R125 R126 R127 R128 R129 R130 R131 R132 R133 R134 R135 R136 R137 R138 R139 R140 R141 R142 R143 R144 R145 R146 R147 R148 R149 R150 R151 R152 R153 R154 R155 R156 R157 R158 R159 R160 R161 R162 R163 R164 R165 R166 R167 R168 R169 R170 R171 R172 R173 R174 R175 R176 R177 R178 R179 R180 R181 R182 R183 R184 R201 R202 R203 R204 R205 R206 R301 R302 R303 R304: library part Resistor, "Resistor"
L1 L2: Code_IEC=1005, Code_JEITA=0402, LatestRevisionDate=29-May-2009, LatestRevisionNote="IPC-7351 Footprint Added.", PackageDescription="Chip Inductor", PackageReference=0402-A, Published=8-Jun-2000, Publisher="Altium Limited"

## Via types
v1: diameter 0.508, hole 0.508, Top Layer to Bottom Layer, 488 vias

## Nets (pads, with @x,y where several pads share a name; then routed paths per layer and width w, separated by ;. In a path a pad name is that pad's centre, name@x,y a point inside that pad or via, vN(x,y) a via of type N, cw(c..) or ccw(c..) an arc to the next point about the centre after c; other vN are vias at no path point)
1v25: U2.13 U10.2 | length 23.7
  Top Layer w0.254: U2.13@113.95,58.825 113.95,60.8 v1(115,61.85) ; v1@127.475,57.6 v1(127.5,57.575) U10.2@127.5,53.1
  Bottom Layer w0.254: v1(115,61.85) 116.8,63.65 121.425,63.65 v1(127.5,57.575)
10v0: C105.2 C106.2 C111.2 C112.2 C117.2 C118.2 C123.2 C124.2 C129.2 C130.2 C135.2 C136.2 C141.2 C142.2 C147.2 C148.2 C153.2 C154.2 C159.2 C160.2 C165.2 C166.2 C171.2 C172.2 C313.2 D302.K R303.2 U101.6 U102.6 U103.6 U104.6 U105.6 U106.6 U107.6 U108.6 U109.6 U110.6 U111.6 U112.6 Z302.K | length 206.4
  Top Layer w0.254: D302.K@19.47,56.45 19.112,56.092 C313.2@19.112,54.85 R303.2@19.112,53.3 19.112,53.2 19.55,53.2 20.1,52.65 20.1,50.8 19.5,50.2 Z302.K@19.762,49.938 ; U101.6@19.475,44.175 19.475,46.163 19.762,46.45 C105.2@19.762,48 ; U102.6@31.475,44.175 31.475,46.163 31.762,46.45 C111.2@31.762,48 ; U103.6@43.475,44.175 43.475,46.163 43.762,46.45 C117.2@43.762,48 ; U104.6@55.475,44.175 55.475,46.163 55.762,46.45 C123.2@55.762,48 ; U105.6@67.475,44.175 67.475,46.163 67.762,46.45 C129.2@67.762,48 ; U106.6@79.475,44.175 79.475,46.163 79.762,46.45 C135.2@79.762,48 ; U107.6@91.475,44.175 91.475,46.163 91.762,46.45 C141.2@91.762,48 ; U108.6@103.475,44.175 103.475,46.163 103.762,46.45 C147.2@103.762,48 ; U109.6@115.475,44.175 115.475,46.163 115.762,46.45 C153.2@115.762,48 ; U110.6@127.475,44.175 127.475,46.163 127.762,46.45 C159.2@127.762,48 ; U111.6@139.475,44.175 139.475,46.163 139.762,46.45 C165.2@139.762,48 ; U112.6@151.475,44.175 151.475,46.163 151.762,46.45 C171.2@151.762,48
  Top Layer w0.762: C105.2@19.762,48 Z302.K@19.762,49.938
  Bottom Layer w0.3: v1(19.75,49.4) 30.5,49.4 ; v1(31.85,48.05) 30.5,49.4 ; v1(43.85,48.2) 43.85,48.45 42.9,49.4 ; v1(55.85,48.15) 54.6,49.4 ; v1(67.95,48.15) 66.7,49.4 ; v1(79.9,48.15) 78.65,49.4 ; v1(91.95,48.15) 90.7,49.4 ; v1(103.9,48.1) 102.6,49.4 ; v1(115.9,48.15) 114.65,49.4 ; v1(127.85,48.15) 126.6,49.4 ; v1(139.9,48.15) 139.3,48.75 ; v1(151.85,48.15) 151.25,48.75 139.3,48.75 ; 30.5,49.4 42.9,49.4 ; 42.9,49.4 54.6,49.4 ; 54.6,49.4 66.7,49.4 ; 66.7,49.4 78.65,49.4 ; 78.65,49.4 90.7,49.4 ; 90.7,49.4 102.6,49.4 ; 102.6,49.4 114.65,49.4 ; 114.65,49.4 126.6,49.4 ; 126.6,49.4 138.65,49.4 139.3,48.75
26v0: C101,2.2 C103,4.2 C107,8.2 C109,10.2 C113,14.2 C115,16.2 C119,20.2 C121,22.2 C125,26.2 C127,28.2 C131,32.2 C133,34.2 C137,38.2 C139,40.2 C143,44.2 C145,46.2 C149,50.2 C151,52.2 C155,56.2 C157,58.2 C161,62.2 C163,64.2 C167,68.2 C169,70.2 C311.2 D301.K Q2,3.2 Q5,6.2 Q8,9.2 Q11,12.2 Q14,15.2 Q17,18.2 Q20,21.2 Q23,24.2 Q26,27.2 Q29,30.2 Q32,33.2 Q35,36.2 Q38,39.2 Q41,42.2 Q44,45.2 Q47,48.2 Q50,51.2 Q53,54.2 Q56,57.2 Q59,60.2 Q62,63.2 Q65,66.2 Q68,69.2 Q71,72.2 R101.2 R103.2 R107.2 R109.2 R113.2 R115.2 R119.2 R121.2 R125.2 R127.2 R131.2 R133.2 R137.2 R139.2 R143.2 R145.2 R149.2 R151.2 R155.2 R157.2 R161.2 R163.2 R167.2 R169.2 R301.2 Z301.K | length 649.8
  Top Layer w0.254: R301.2@151.1,53.6 R301.2@151.112,53.6 ; R301.2@151.112,53.625 R301.2@151.112,53.6 ; Z301.K@151.5,50.525 152.1,51.125 152.1,52.975 R301.2@151.55,53.525 ; R301.2@151.112,53.6 151.475,53.6 R301.2@151.55,53.525 ; R301.2@151.112,53.6 151.112,53.525 R301.2@151.55,53.525
  Top Layer w0.381: R301.2@151.112,53.625 C311.2@151.112,55.175
  Top Layer w0.508: C311.2@151.112,55.175 151.47,55.533 D301.K@151.47,56.775
  Top Layer w0.6: v1(16.7,33.45) 17.1,33.45 17.45,33.1 17.45,31.85 ; v1(16.775,22.05) 17.45,22.725 17.45,24.15 ; v1(28.7,33.45) 29.1,33.45 29.45,33.1 29.45,31.85 ; v1(28.775,22.05) 29.45,22.725 29.45,24.15 ; v1(40.7,33.45) 41.1,33.45 41.45,33.1 41.45,31.85 ; v1(40.775,22.05) 41.45,22.725 41.45,24.15 ; v1(52.7,33.45) 53.1,33.45 53.45,33.1 53.45,31.85 ; v1(52.775,22.05) 53.45,22.725 53.45,24.15 ; v1(64.7,33.45) 65.1,33.45 65.45,33.1 65.45,31.85 ; v1(64.775,22.05) 65.45,22.725 65.45,24.15 ; v1(76.7,33.45) 77.1,33.45 77.45,33.1 77.45,31.85 ; v1(76.775,22.05) 77.45,22.725 77.45,24.15 ; v1(88.7,33.45) 89.1,33.45 89.45,33.1 89.45,31.85 ; v1(88.775,22.05) 89.45,22.725 89.45,24.15 ; v1(100.7,33.45) 101.1,33.45 101.45,33.1 101.45,31.85 ; v1(100.775,22.05) 101.45,22.725 101.45,24.15 ; v1(112.7,33.45) 113.1,33.45 113.45,33.1 113.45,31.85 ; v1(112.775,22.05) 113.45,22.725 113.45,24.15 ; v1(124.7,33.45) 125.1,33.45 125.45,33.1 125.45,31.85 ; v1(124.775,22.05) 125.45,22.725 125.45,24.15 ; v1(136.7,33.45) 137.1,33.45 137.45,33.1 137.45,31.85 ; v1(136.775,22.05) 137.45,22.725 137.45,24.15 ; v1(148.7,33.45) 149.1,33.45 149.45,33.1 149.45,31.85 ; v1(148.775,22.05) 149.45,22.725 149.45,24.15
  Top Layer w0.712: 148.775,20 148.775,12.975 151.85,9.9 155.3,9.9 156.35,10.95 156.35,18 156.35,50.9 152.075,55.175 C311.2@151.112,55.175
  Top Layer w0.762: v1(16.775,20) 16.775,13.275 19.75,10.3 23,10.3 25.675,12.975 28.775,12.975 ; 28.775,20 28.775,12.975 ; 40.775,20 40.775,13.236 ; 52.775,20 52.775,13.575 ; 64.775,20 64.775,13.125 ; 76.775,20 76.775,13.025 ; 88.775,20 88.775,12.875 ; 100.775,20 100.775,12.975 ; 112.775,20 112.775,13.475 ; 124.775,20 124.775,12.825 ; 136.775,20 136.775,12.825 ; 148.775,12.975 145.775,12.975 142.65,9.85 139.75,9.85 136.775,12.825 ; 28.775,12.975 31.75,10 34.85,10 38.086,13.236 40.775,13.236 ; 40.775,13.236 43.961,10.05 47.05,10.05 50.575,13.575 52.775,13.575 ; 52.775,13.575 56.05,10.3 59.25,10.3 62.075,13.125 64.775,13.125 ; 64.775,13.125 67.9,10 71.1,10 74.125,13.025 76.775,13.025 ; 76.775,13.025 79.7,10.1 82.9,10.1 85.675,12.875 88.775,12.875 ; 88.775,12.875 91.7,9.95 94.85,9.95 97.875,12.975 100.775,12.975 ; 100.775,12.975 103.75,10 107,10 110.475,13.475 112.775,13.475 ; 112.775,13.475 116.35,9.9 118.7,9.9 121.625,12.825 124.775,12.825 ; 124.775,12.825 127.75,9.85 130.55,9.85 133.525,12.825 136.775,12.825
  Top Layer w1.27: v1(16.775,20) v1(16.775,22.05) ; 28.775,20 v1(28.775,22.05) ; 40.775,20 v1(40.775,22.05) ; 52.775,20 v1(52.775,22.05) ; 64.775,20 v1(64.775,22.05) ; 76.775,20 v1(76.775,22.05) ; 88.775,20 v1(88.775,22.05) ; 100.775,20 v1(100.775,22.05) ; 112.775,20 v1(112.775,22.05) ; 124.775,20 v1(124.775,22.05) ; 136.775,20 v1(136.775,22.05) ; 148.775,20 v1(148.775,22.05)
  Bottom Layer w0.254: 16.788,31.662 v1(19.8,28.65) ; 28.787,31.662 v1(31.8,28.65) ; 40.788,31.662 v1(43.8,28.65) ; 52.787,31.662 v1(55.8,28.65) ; 64.788,31.662 v1(67.8,28.65) ; 76.787,31.662 v1(79.8,28.65) ; 88.788,31.662 v1(91.8,28.65) ; 100.787,31.662 v1(103.8,28.65) ; 112.788,31.662 v1(115.8,28.65) ; 124.787,31.662 v1(127.8,28.65) ; 136.787,31.662 v1(139.8,28.65) ; 148.788,31.662 v1(151.8,28.65)
  Bottom Layer w0.381: v1@16.6,39.55 16.7,39.45 v1(16.7,33.45) 16.7,22.15 16.775,22.075 v1(16.775,22.05) ; v1@28.6,39.55 28.7,39.45 v1(28.7,33.45) 28.7,22.15 28.775,22.075 v1(28.775,22.05) ; v1@40.6,39.55 40.7,39.45 v1(40.7,33.45) 40.7,22.15 40.775,22.075 v1(40.775,22.05) ; v1@52.6,39.55 52.7,39.45 v1(52.7,33.45) 52.7,22.15 52.775,22.075 v1(52.775,22.05) ; v1@64.6,39.55 64.7,39.45 v1(64.7,33.45) 64.7,22.15 64.775,22.075 v1(64.775,22.05) ; v1@76.6,39.55 76.7,39.45 v1(76.7,33.45) 76.7,22.15 76.775,22.075 v1(76.775,22.05) ; v1@88.6,39.55 88.7,39.45 v1(88.7,33.45) 88.7,22.15 88.775,22.075 v1(88.775,22.05) ; v1@100.6,39.55 100.7,39.45 v1(100.7,33.45) 100.7,22.15 100.775,22.075 v1(100.775,22.05) ; v1@112.6,39.55 112.7,39.45 v1(112.7,33.45) 112.7,22.15 112.775,22.075 v1(112.775,22.05) ; v1@124.6,39.55 124.7,39.45 v1(124.7,33.45) 124.7,22.15 124.775,22.075 v1(124.775,22.05) ; v1@136.6,39.55 136.7,39.45 v1(136.7,33.45) 136.7,22.15 136.775,22.075 v1(136.775,22.05) ; v1@148.6,39.55 148.7,39.45 v1(148.7,33.45) 148.7,22.15 148.775,22.075 v1(148.775,22.05)
  Bottom Layer w0.6: v1(16.775,20) v1(16.775,22.05)
  other v1: 16.65,39.55 28.65,39.55 40.65,39.55 52.65,39.55 64.65,39.55 76.65,39.55 88.65,39.55 100.65,39.55 112.65,39.55 124.65,39.55 136.65,39.55 148.65,39.55
AREF1: C1.2 U1.20 | length 2.3
  Top Layer w0.254: U1.20@66.45,61.375 66.45,63.093 C1.2@66.895,63.538
AREF2: C2.2 U2.20 | length 15.5
  Top Layer w0.254: C2.2@103.762,49.8 103.762,50.338 102.85,51.25 102.85,55.7 103.75,56.6 U2.20@111.725,56.6
cnt_1: U5.4 U6.11 U7.11 | length 114.1
  Top Layer w0.254: U6.11@32.975,54.095 34.105,54.095 v1(35.15,53.05) ; v1(51.15,52.5) U5.4@53.375,52.5 ; v1(138.15,52.85) 138.15,53 139.245,54.095 U7.11@140.975,54.095
  Bottom Layer w0.254: v1(35.15,53.05) 35.55,53.05 36.95,51.65 45.7,51.65 47.05,53 50.65,53 v1(51.15,52.5) 52.45,51.2 59,51.2 136.9,51.2 138.15,52.45 v1(138.15,52.85)
cnt_2: U5.5 U6.10 U7.10 | length 114.7
  Top Layer w0.254: U6.10@32.975,52.825 33.475,52.825 35,51.3 v1(35.3,51.3) ; v1(50.3,51.05) 51.6,51.05 51.8,51.25 52.55,52 U5.5@53.375,52 ; v1@138.55,51 140.375,52.825 U7.10@140.975,52.825
  Bottom Layer w0.254: v1(35.3,51.3) 35.6,51 46.25,51 47.6,52.35 49.3,52.35 50.3,51.35 v1(50.3,51.05) 50.75,50.6 137.95,50.6 v1(138.55,51.2)
cnt_3: U5.7 U6.9 U7.9 | length 115.8
  Top Layer w0.254: v1(48.8,51.05) 48.8,50.6 49.3,50.1 52.85,50.1 53.375,50.625 U5.7@53.375,50.994
  Bottom Layer w0.254: v1(33.1,51.15) 34.15,50.1 49.3,50.1 ; v1(48.8,51.05) 48.8,50.6 49.3,50.1 ; v1@141,51.2 139.85,50.05 49.35,50.05 49.3,50.1
  other v1: 140.95,51.25
GND: B1.2 B2.2 B3.2 C1.1 C2.1 C3.1 C4.1 C5.1 C6.1 C101,2.1 C103,4.1 C105.1 C106.1 C107,8.1 C109,10.1 C111.1 C112.1 C113,14.1 C115,16.1 C117.1 C118.1 C119,20.1 C121,22.1 C123.1 C124.1 C125,26.1 C127,28.1 C129.1 C130.1 C131,32.1 C133,34.1 C135.1 C136.1 C137,38.1 C139,40.1 C141.1 C142.1 C143,44.1 C145,46.1 C147.1 C148.1 C149,50.1 C151,52.1 C153.1 C154.1 C155,56.1 C157,58.1 C159.1 C160.1 C161,62.1 C163,64.1 C165.1 C166.1 C167,68.1 C169,70.1 C171.1 C172.1 C310.1 C311.1 C312.1 C313.1 C314.1 C315.1 C316.1 P1.6 Q1,4.2 Q1,4.5 Q2,3.5 Q5,6.5 Q7,10.2 Q7,10.5 Q8,9.5 Q11,12.5 Q13,16.2 Q13,16.5 Q14,15.5 Q17,18.5 Q19,22.2 Q19,22.5 Q20,21.5 Q23,24.5 Q25,28.2 Q25,28.5 Q26,27.5 Q29,30.5 Q31,34.2 Q31,34.5 Q32,33.5 Q35,36.5 Q37,40.2 Q37,40.5 Q38,39.5 Q41,42.5 Q43,46.2 Q43,46.5 Q44,45.5 Q47,48.5 Q49,52.2 Q49,52.5 Q50,51.5 Q53,54.5 Q55,58.2 Q55,58.5 Q56,57.5 Q59,60.5 Q61,64.2 Q61,64.5 Q62,63.5 Q65,66.5 Q67,70.2 Q67,70.5 Q68,69.5 Q71,72.5 R7.2 R8.1 R9.1 R10.1 R202.2 R203.2 R204.2 R205.2 R206.2 R302.1 R304.1 S2.1 U1.5 U1.21 U2.5 U2.21 U3.2 U4.2 U5.8 U6.7 U6.8 U7.7 U7.8 U9.4 U10.3 U101.3 U101.9 U102.3 U102.9 U103.3 U103.9 U104.3 U104.9 U105.3 U105.9 U106.3 U106.9 U107.3 U107.9 U108.3 U108.9 U109.3 U109.9 U110.3 U110.9 U111.3 U111.9 U112.3 U112.9 Z101.A Z102.A Z103.A Z104.A Z105.A Z106.A Z107.A Z108.A Z109.A Z110.A Z111.A Z112.A Z301.A Z302.A | length 1377.6
  Top Layer w0.254: U4.2@17.025,58.95 16.35,58.95 16,59.3 16,60.5 16.938,61.438 C312.1@17.05,61.438 ; v1(17.55,48.1) 17.23,48.42 Z302.A@17.23,50.2 17.562,50.2 v1(19.112,51.75) ; U6.7@27.125,52.825 U6.7@27.525,52.825 U6.8@27.525,51.555 ; U9.4@41.05,49.696 40.054,49.696 38.4,51.35 38.4,54.6 39.85,56.05 v1(42.188,56.05) ; C123.1@54.35,48.112 U5.8@54.35,50.525 ; U1.21@65.95,61.375 65.954,61.379 65.954,64.804 66.212,65.062 C1.1@66.895,65.062 C4.1@68.495,65.062 ; C3.1@66.306,51.4 C3.1@66.45,51.4 ; C129.1@66.45,48.212 C3.1@66.45,51.4 ; C3.1@66.45,51.713 C3.1@66.45,51.4 ; U1.5@66.45,56.425 66.45,55.75 68.45,53.75 68.45,52.25 67.6,51.4 C3.1@66.45,51.4 ; C6.1@87.95,56.162 S2.1@89.681,56.162 ; v1(104,55.25) 106.85,55.25 107.7,56.1 U2.21@111.725,56.1 ; U2.5@116.675,56.6 120.25,56.6 121,57.35 v1(122.9,57.35) 123.926,57.35 ; 123.976,57.4 C5.1@124.276,57.7 ; U7.8@135.525,51.555 U7.7@135.525,52.825 ; U111.9@139.15,41.95 U111.9@139.358,41.95 ; U3.2@149.025,59.275 148.325,59.275 148.05,59.55 148.05,60.875 148.938,61.763 C310.1@149.05,61.763 ; Z301.A@149.23,50.45 Z301.A@149.23,50.525 149.562,50.525 v1(151.112,52.075)
  Top Layer w0.3: C106.1@18.238,46.4 C105.1@18.238,48 ; v1(19.05,33.4) 19.05,34.65 19.05,36.95 ; U101.3@19.475,39.725 U101.9@19.475,41.625 ; v1(27.95,50.9) 27.95,51.13 U6.8@27.525,51.555 27.525,49.375 28.8,48.1 v1(29.55,48.1) ; C112.1@30.238,46.4 C111.1@30.238,48 ; v1(31.05,33.4) 31.05,34.65 31.05,36.95 ; U102.3@31.475,39.725 U102.9@31.475,41.625 ; U9.4@41.05,49.696 41.05,48.6 v1(41.55,48.1) ; C118.1@42.238,46.4 C117.1@42.238,48 ; v1(43.05,33.4) 43.05,34.65 43.05,36.95 ; U103.3@43.475,39.725 U103.9@43.475,41.625 ; C124.1@54.238,46.4 C123.1@54.238,48 C123.1@54.35,48.112 ; v1(55.05,33.4) 55.05,34.65 55.05,36.95 ; U104.3@55.475,39.725 U104.9@55.475,41.625 ; R9.1@57.162,67.95 R7.2@58.888,67.95 ; C130.1@66.238,46.4 C129.1@66.238,48 ; v1(67.05,33.4) 67.05,34.65 67.05,36.95 ; U105.3@67.475,39.725 U105.9@67.475,41.625 ; C4.1@68.657,64.9 69.007,65.25 74.85,65.25 ; 71.65,65.3 R203.2@71.65,66.438 ; v1(73.9,68.85) 74.85,67.9 74.85,65.25 ; C136.1@78.238,46.4 C135.1@78.238,48 ; v1(79.05,33.4) 79.05,34.65 79.05,36.95 ; U106.3@79.475,39.725 U106.9@79.475,41.625 ; v1(87.8,64.5) 87.05,65.25 74.85,65.25 ; S2.1@89.786,56.268 90.819,57.3 v1(95,57.3) 99.9,52.4 101.544,52.4 ; C142.1@90.238,46.4 C141.1@90.238,48 ; v1(91.05,33.4) 91.05,34.65 91.05,36.95 ; P1.6@91.312,61.614 v1@92.85,61.614 ; U107.3@91.475,39.725 U107.9@91.475,41.625 ; v1(101.544,55.25) 101.544,52.4 ; C148.1@102.238,46.4 C147.1@102.238,48 101.938,49.749 101.938,49.75 101.544,50.144 101.544,52.4 ; v1(103.05,33.4) 103.05,34.65 103.05,36.95 ; U108.3@103.475,39.725 U108.9@103.475,41.625 ; C154.1@114.238,46.4 C153.1@114.238,48 ; v1(115.05,33.4) 115.05,34.65 115.05,36.95 ; U109.3@115.475,39.725 U109.9@115.475,41.625 ; v1(122.05,53.1) 122.05,51.7 123.25,50.5 125.35,50.5 126.238,49.612 C159.1@126.238,48 C160.1@126.238,46.4 ; R10.1@124.162,67.9 v1(124.162,68.1) ; C5.1@124.512,57.712 125.338,57.712 126.55,56.5 U10.3@126.55,55.5 ; v1(127.05,33.4) 127.05,34.65 127.05,36.95 ; U110.3@127.475,39.725 U110.9@127.475,41.625 ; C166.1@138.238,46.4 C165.1@138.238,48 ; v1(139.05,33.4) 139.05,34.65 139.05,36.95 ; U111.9@139.151,41.024 139.475,40.7 U111.3@139.475,39.725 ; R205.2@142.95,66.538 145.1,64.388 v1(145.1,61.8) ; C172.1@150.238,46.4 C171.1@150.238,48 ; v1(151.05,33.4) 151.05,34.65 151.05,36.95 ; U112.3@151.475,39.725 U112.9@151.475,41.625
  Top Layer w0.508: 48.5,20.05 B1.2@48.5,44 ; v1(89.88,47.2) C141.1@89.88,47.57 ; v1(125.9,47.2) 125.9,47.55 ; U7.8@135.525,51.555 137.55,49.53 v1(137.55,48.1) ; Z301.A@149.23,50.45 149.55,50.13 149.55,47.65 v1(150.05,47.15)
  Top Layer w0.6: 17.45,26.45 17.45,28 ; 17.45,29.55 17.45,28 ; v1(18.15,28) 17.45,28 ; 29.45,26.45 29.45,28 ; 29.45,29.55 29.45,28 ; v1(30.15,28) 29.45,28 ; 41.45,26.45 41.45,28 ; 41.45,29.55 41.45,28 ; v1(42.15,28) 41.45,28 ; 53.45,26.45 53.45,28 ; 53.45,29.55 53.45,28 ; v1(54.15,28) 53.45,28 ; 65.45,26.45 65.45,28 ; 65.45,29.55 65.45,28 ; v1(66.15,28) 65.45,28 ; 77.45,26.45 77.45,28 ; 77.45,29.55 77.45,28 ; v1(78.15,28) 77.45,28 ; 89.45,26.45 89.45,28 ; 89.45,29.55 89.45,28 ; v1(90.15,28) 89.45,28 ; 101.45,26.45 101.45,28 ; 101.45,29.55 101.45,28 ; v1(102.15,28) 101.45,28 ; 113.45,26.45 113.45,28 ; 113.45,29.55 113.45,28 ; v1(114.15,28) 113.45,28 ; 125.45,26.45 125.45,28 ; 125.45,29.55 125.45,28 ; v1(126.15,28) 125.45,28 ; 137.45,26.45 137.45,28 ; 137.45,29.55 137.45,28 ; v1(138.15,28) 137.45,28 ; 149.45,26.45 149.45,28 ; 149.45,29.55 149.45,28 ; v1(150.15,28) 149.45,28
  Top Layer w0.762: v1@19.725,20 v1(19.75,20) v1(26.7,20) ; v1@31.725,20 v1(31.75,20) v1(38.05,20) ; v1@43.725,20 v1(43.75,20) v1(50.25,20) ; B1.2@48.5,44.05 51.888,47.438 C314.1@52.65,47.438 53.741,47.438 ; v1@55.725,20 v1(55.75,20) v1(62.2,20) ; v1@67.725,20 v1(67.75,20) v1(74.4,20) ; v1@79.725,20 v1(79.75,20) v1(86.25,20) ; 84.5,20.15 B2.2@84.5,44 84.5,44.2 87.688,47.388 C315.1@88.65,47.388 89.692,47.388 ; v1@91.725,20 v1(91.75,20) v1(98.35,20) ; v1@103.725,20 v1(103.75,20) v1(110.25,20) ; v1@115.725,20 v1(115.75,20) v1(122.35,20) ; 120.5,20.15 B3.2@120.5,44 120.5,44.3 123.738,47.538 C316.1@124.65,47.538 125.562,47.538 v1(125.9,47.2) ; v1@127.725,20 v1(127.75,20) v1(134.8,20) ; v1@139.725,20 v1(139.75,20) v1(146.1,20)
  Top Layer w1.27: v1@19.725,20 v1@19.725,22.05 ; v1@31.725,20 v1@31.725,22.05 ; v1@43.725,20 v1@43.725,22.05 ; v1@55.725,20 v1@55.725,22.05 ; v1@67.725,20 v1@67.725,22.05 ; v1@79.725,20 v1@79.725,22.05 ; v1@91.725,20 v1@91.725,22.05 ; v1@103.725,20 v1@103.725,22.05 ; v1@115.725,20 v1@115.725,22.05 ; v1@127.725,20 v1@127.725,22.05 ; v1@139.725,20 v1@139.725,22.05 ; v1@151.725,20 v1@151.725,22.05
  Bottom Layer w0.254: v1(17.15,1.4) 17.85,1.4 20.35,3.9 20.35,19.4 v1(19.75,20) ; v1(29.15,1.4) 29.85,1.4 31.75,3.3 v1(31.75,20) ; v1(41.15,1.4) 41.85,1.4 43.75,3.3 v1(43.75,20) ; v1(53.15,1.4) 53.85,1.4 55.75,3.3 v1(55.75,20) ; v1(65.15,1.4) 65.85,1.4 67.75,3.3 v1(67.75,20) ; v1(77.15,1.4) 77.85,1.4 79.75,3.3 v1(79.75,20) ; v1(89.15,1.4) 89.85,1.4 91.75,3.3 v1(91.75,20) ; v1(101.15,1.4) 101.85,1.4 103.75,3.3 v1(103.75,20) ; v1(113.15,1.4) 113.85,1.4 115.75,3.3 v1(115.75,20) ; v1@121.875,53.275 122.9,54.3 v1(122.9,57.35) ; v1(125.15,1.4) 125.85,1.4 127.75,3.3 v1(127.75,20) ; v1(137.15,1.4) 137.85,1.4 139.75,3.3 v1(139.75,20) ; v1(149.15,1.4) 149.85,1.4 151.75,3.3 v1(151.75,20)
  Bottom Layer w0.3: v1(16.85,61.35) 17.6,62.1 28,62.1 30.55,59.55 30.55,52.95 28.5,50.9 v1(27.95,50.9) ; v1(17.55,48.1) 18.7,48.1 21.7,45.1 21.7,43 20.6,41.9 v1(19.4,41.9) ; 18.1,27.15 18.2,27.05 20.25,27.05 21,27.8 21,29.65 19.85,30.8 19.85,32.6 v1(19.05,33.4) 19.05,41.1 ; 18.75,41.4 19.05,41.1 ; 19.05,41.25 19.05,41.1 ; 19.1,41.05 19.05,41.1 ; v1(29.55,48.1) 29.55,47.05 31.25,45.35 32.9,45.35 33.7,44.55 33.7,43 32.6,41.9 31.4,41.9 ; 30.1,27.15 30.2,27.05 32.25,27.05 33,27.8 33,29.65 31.85,30.8 31.85,32.6 v1(31.05,33.4) ; 30.75,41.4 31.05,41.1 ; 31.05,41.25 31.05,41.1 ; 31.1,41.05 31.05,41.1 ; 31.35,33.4 v1(31.05,33.4) ; v1(37.75,66.4) 40.2,68.85 58.9,68.85 ; v1(41.55,48.1) 41.55,46.9 43.05,45.4 45,45.4 45.7,44.7 45.7,43 44.6,41.9 v1(43.4,41.9) ; 42.1,27.15 42.2,27.05 44.25,27.05 45,27.8 45,29.65 43.85,30.8 43.85,32.6 v1(43.05,33.4) ; 42.75,41.4 43.05,41.1 ; 43.05,41.25 43.05,41.1 ; 43.1,41.05 43.05,41.1 ; 43.35,33.4 v1(43.05,33.4) ; v1(53.929,47.25) 53.929,47.179 55.708,45.4 57,45.4 57.7,44.7 57.7,43 56.6,41.9 v1(55.4,41.9) ; 54.1,27.15 54.2,27.05 56.25,27.05 57,27.8 57,29.65 55.85,30.8 55.85,32.6 v1(55.05,33.4) ; 54.75,41.4 55.05,41.1 ; 55.05,41.25 55.05,41.1 ; 55.1,41.05 55.05,41.1 ; 55.35,33.4 v1(55.05,33.4) ; v1(58.9,68) 58.9,68.85 ; v1(65.55,48.1) 65.55,46.5 66.8,45.25 69.25,45.25 69.7,44.8 69.7,43 68.6,41.9 v1(67.4,41.9) ; 66.1,27.15 66.2,27.05 68.25,27.05 69,27.8 69,29.65 67.85,30.8 67.85,32.6 v1(67.05,33.4) ; 66.75,41.4 67.05,41.1 ; 67.05,41.25 67.05,41.1 ; 67.1,41.05 67.05,41.1 ; 67.35,33.4 v1(67.05,33.4) ; v1(77.55,48.1) 77.55,46.7 78.8,45.45 81,45.45 81.7,44.75 81.7,43 80.6,41.9 v1(79.4,41.9) ; 78.1,27.15 78.2,27.05 80.25,27.05 81,27.8 81,29.65 79.85,30.8 79.85,32.6 v1(79.05,33.4) ; 78.75,41.4 79.05,41.1 ; 79.05,41.25 79.05,41.1 ; 79.1,41.05 79.05,41.1 ; 79.35,33.4 v1(79.05,33.4) ; v1(87.8,64.5) 93.05,59.25 ; v1(89.88,47.2) 89.88,47.03 91.51,45.4 93.1,45.4 93.7,44.8 93.7,43 92.6,41.9 v1(91.4,41.9) ; 90.1,27.15 90.2,27.05 92.25,27.05 93,27.8 93,29.65 91.85,30.8 91.85,32.6 v1(91.05,33.4) ; 90.75,41.4 91.05,41.1 ; 91.05,41.25 91.05,41.1 ; 91.1,41.05 91.05,41.1 ; 91.35,33.4 v1(91.05,33.4) ; v1(91.35,67.8) 92.6,67.8 93.65,68.85 ; v1(93.05,61.75) 93.05,59.25 ; v1(95,57.3) 93.05,59.25 ; v1(101.544,55.25) v1(104,55.25) ; 102.1,27.15 102.2,27.05 104.25,27.05 105,27.8 105,29.65 103.85,30.8 103.85,32.6 v1(103.05,33.4) ; v1(102.1,47) 101.95,47 103.65,45.3 105.2,45.3 105.7,44.8 105.7,43 104.6,41.9 v1(103.4,41.9) ; 102.75,41.4 103.05,41.1 ; 103.05,41.25 103.05,41.1 ; 103.1,41.05 103.05,41.1 ; 103.35,33.4 v1(103.05,33.4) ; v1(113.55,48.1) 113.55,46.6 114.9,45.25 117.3,45.25 117.7,44.85 117.7,43 116.6,41.9 v1(115.4,41.9) ; 114.1,27.15 114.2,27.05 116.25,27.05 117,27.8 117,29.65 115.85,30.8 115.85,32.6 v1(115.05,33.4) ; 114.75,41.4 115.05,41.1 ; 115.05,41.25 115.05,41.1 ; 115.1,41.05 115.05,41.1 ; 115.35,33.4 v1(115.05,33.4) ; v1(124.162,68.1) 122.962,66.9 v1(106.95,66.9) 105,68.85 93.65,68.85 ; 126.1,27.15 126.2,27.05 128.25,27.05 129,27.8 129,29.65 127.85,30.8 127.85,32.6 v1(127.05,33.4) ; 126.125,47.025 127.7,45.45 129.1,45.45 129.7,44.85 129.7,43 128.6,41.9 v1(127.4,41.9) ; 126.75,41.4 127.05,41.1 ; 127.05,41.25 127.05,41.1 ; 127.1,41.05 127.05,41.1 ; 127.35,33.4 v1(127.05,33.4) ; v1(137.55,48.1) 137.55,46.45 138.75,45.25 141.3,45.25 141.7,44.85 141.7,43 140.6,41.9 v1(139.4,41.9) ; 138.1,27.15 138.2,27.05 140.25,27.05 141,27.8 141,29.65 139.85,30.8 139.85,32.6 v1(139.05,33.4) ; 138.75,41.4 139.05,41.1 v1(139.05,33.4) ; 139.35,33.4 v1(139.05,33.4) ; v1(145.1,61.8) v1@148.85,61.8 ; v1(150.05,47.15) 151.75,45.45 153.05,45.45 153.7,44.8 153.7,43 152.725,42.025 v1(151.15,42.025) ; 150.1,27.15 150.2,27.05 152.25,27.05 153,27.8 153,29.65 151.85,30.8 151.85,32.6 v1(151.05,33.4) ; v1@151.05,41.925 v1(151.05,33.4) ; 151.35,33.4 v1(151.05,33.4) ; v1(31.05,33.4) 31.05,41.1 ; v1(43.05,33.4) 43.05,41.1 ; v1(55.05,33.4) 55.05,41.1 ; 58.9,68.85 v1(73.9,68.85) 93.65,68.85 ; v1(67.05,33.4) 67.05,41.1 ; v1(79.05,33.4) 79.05,41.1 ; v1(91.05,33.4) 91.05,41.1 ; v1(103.05,33.4) 103.05,41.1 ; v1(115.05,33.4) 115.05,41.1 ; v1(127.05,33.4) 127.05,41.1
  Bottom Layer w0.508: v1(16.85,61.35) 17.588,60.612 v1(17.588,54.85) 17.588,53.274 v1(19.112,51.75) ; v1(148.95,61.7) 149.588,61.062 v1(149.588,55.175) 149.588,53.599 v1(151.112,52.075)
  Bottom Layer w0.6: v1(18.15,28) 18.1,27.95 18.1,27.15 18.1,23.7 v1(19.75,22.05) v1(19.75,20) ; v1(30.15,28) 30.1,27.95 30.1,27.15 30.1,23.7 v1(31.75,22.05) v1(31.75,20) ; v1(42.15,28) 42.1,27.95 42.1,27.15 42.1,23.7 v1(43.75,22.05) v1(43.75,20) ; v1(54.15,28) 54.1,27.95 54.1,27.15 54.1,23.7 v1(55.75,22.05) v1(55.75,20) ; v1(66.15,28) 66.1,27.95 66.1,27.15 66.1,23.7 v1(67.75,22.05) v1(67.75,20) ; v1(78.15,28) 78.1,27.95 78.1,27.15 78.1,23.7 v1(79.75,22.05) v1(79.75,20) ; v1(90.15,28) 90.1,27.95 90.1,27.15 90.1,23.7 v1(91.75,22.05) v1(91.75,20) ; v1(102.15,28) 102.1,27.95 102.1,27.15 102.1,23.7 v1(103.75,22.05) v1(103.75,20) ; v1(114.15,28) 114.1,27.95 114.1,27.15 114.1,23.7 v1(115.75,22.05) v1(115.75,20) ; v1(126.15,28) 126.1,27.95 126.1,27.15 126.1,23.7 v1(127.75,22.05) v1(127.75,20) ; v1(138.15,28) 138.1,27.95 138.1,27.15 138.1,23.7 v1(139.75,22.05) v1(139.75,20) ; v1(150.15,28) 150.1,27.95 150.1,27.15 150.1,23.7 v1(151.75,22.05) v1(151.75,20)
  Bottom Layer w0.762: v1(26.7,20) v1(31.75,20) ; v1(38.05,20) v1(43.75,20) ; v1(50.25,20) v1(55.75,20) ; v1(62.2,20) v1(67.75,20) ; v1(74.4,20) v1(79.75,20) ; v1(86.25,20) v1(91.75,20) ; v1(98.35,20) v1(103.75,20) ; v1(110.25,20) v1(115.75,20) ; v1(122.35,20) v1(127.75,20) ; v1(134.8,20) v1(139.75,20) ; v1(146.1,20) v1(151.75,20)
  other v1: 31.1,41.85
M1+: Q1,4.1 U1.27 U101.4 | length 72.1
  Top Layer w0.254: 20,36.95 v1(20.3,36.95) ; U101.4@20.125,39.725 v1(20.6,39.725) 21.7,40.825 21.7,44.05 25,47.35 25,48.8 24.2,49.6 24.2,53.7 22.35,55.55 22.35,61.15 24.9,63.7 58.45,63.7 62.5,59.65 U1.27@63.725,59.65
  Bottom Layer w0.254: v1(20.3,36.95) 20.3,39.425 v1(20.6,39.725)
M1-: Q1,4.3 U1.28 U101.2 | length 73.8
  Top Layer w0.254: 18.1,36.95 18.1,37.7 18.825,38.425 ; U101.2@18.825,39.725 18.825,38.425 ; U1.28@63.725,59.15 62.1,59.15 58.25,63 25.3,63 23.1,60.8 23.1,55.8 24.8,54.1 24.8,50.15 25.65,49.3 25.65,46.9 22.35,43.6 22.35,39.7 21.075,38.425 18.825,38.425
M2+: Q7,10.1 U1.30 U102.4 | length 50.3
  Top Layer w0.254: v1(32.5,39.725) 33.775,41 33.775,44.425 36.35,47 36.35,54.55 42.675,60.875 58.525,60.875 61.242,58.158 62.25,58.158 ; 62.25,58.15 U1.30@63.725,58.15
  Bottom Layer w0.254: v1(32.3,37) 32.3,39.525 v1(32.5,39.725)
M2-: Q7,10.3 U1.31 U102.2 | length 52.7
  Top Layer w0.254: 30.1,36.95 30.1,37.7 30.825,38.425 ; U102.2@30.825,39.725 30.825,38.425 ; 61.6,57.65 U1.31@63.725,57.65 ; 61.6,57.658 60.792,57.658 58.2,60.25 43.1,60.25 37.2,54.35 37.2,46.862 34.7,44.362 34.7,40.575 32.55,38.425 30.825,38.425
M3+: Q13,16.1 U1.32 U103.4 | length 41.5
  Top Layer w0.254: 44,36.95 v1(44.7,36.95) ; U103.4@44.125,39.725 v1(44.7,39.725) 44.775,39.725 46.25,41.2 46.25,56.8 49.15,59.7 57.85,59.7 60.4,57.15 U1.32@63.725,57.15
  Bottom Layer w0.254: v1(44.7,36.95) v1(44.7,39.725)
M3-: Q13,16.3 U1.1 U103.2 | length 44
  Top Layer w0.254: 42.1,36.95 42.1,37.7 42.825,38.425 ; U103.2@42.825,39.725 42.825,38.425 ; U1.1@64.442,56.425 60.16,56.425 57.585,59 49.45,59 46.85,56.4 46.85,39.85 45.425,38.425 42.825,38.425
M4+: Q19,22.1 U1.2 U104.4 | length 24.1
  Top Layer w0.254: 56.05,36.9 v1(56.65,36.9) ; U104.4@56.125,39.725 v1(56.7,39.725) 62.4,45.425 62.4,53.35 64.95,55.9 U1.2@64.95,56.425
  Bottom Layer w0.254: v1(56.65,36.9) 56.65,39.675 v1(56.7,39.725)
M4-: Q19,22.3 U1.3 U104.2 | length 27.3
  Top Layer w0.254: 54.1,36.95 54.1,37.7 54.825,38.425 ; U104.2@54.825,39.725 54.825,38.425 ; U1.3@65.45,56.425 65.45,55.45 63.15,53.15 63.15,43.6 57.975,38.425 54.825,38.425
M5+: Q25,28.1 U1.6 U105.4 | length 22.2
  Top Layer w0.254: U1.6@66.95,56.425 66.95,55.995 69.85,53.095 69.85,40.925 v1(68.65,39.725) U105.4@68.125,39.725 ; 68,36.95 v1(68.45,36.95)
  Bottom Layer w0.254: v1(68.45,36.95) 68.45,39.525 v1(68.65,39.725)
M5-: Q25,28.3 U1.9 U105.2 | length 25.6
  Top Layer w0.254: 66.1,36.95 66.1,37.7 66.825,38.425 ; U105.2@66.825,39.725 66.825,38.425 ; U1.9@68.675,57.15 68.675,55.625 70.75,53.55 70.75,40.075 69.1,38.425 66.825,38.425
M6+: Q31,34.1 U1.10 U106.4 | length 29.3
  Top Layer w0.254: U1.10@68.675,57.65 69.95,57.65 78.35,49.25 81.044,49.25 81.7,48.594 81.7,41 80.6,39.9 v1(80.6,39.725) U106.4@80.125,39.725
  Bottom Layer w0.254: v1(80.55,36.95) v1@80.55,39.675
M6-: Q31,34.3 U1.11 U106.2 | length 34.1
  Top Layer w0.254: U1.11@68.675,58.15 70.5,58.15 78.75,49.9 81.55,49.9 82.4,49.05 82.4,39.6 81.225,38.425 78.825,38.425 ; 78.1,36.95 78.1,37.7 78.825,38.425 ; U106.2@78.825,39.725 78.825,38.425
M7+: Q37,40.1 U1.12 U107.4 | length 44.4
  Top Layer w0.254: U1.12@68.675,58.65 81.45,58.65 83.7,56.4 83.7,51.25 85,49.95 91.9,49.95 93.7,48.15 93.7,40.725 v1(92.7,39.725) U107.4@92.125,39.725
  Bottom Layer w0.254: v1(92.55,36.95) v1@92.55,39.575
M7-: Q37,40.3 U1.13 U107.2 | length 49.6
  Top Layer w0.254: U1.13@68.675,59.15 82,59.15 84.35,56.8 84.35,51.6 85.4,50.55 92.425,50.55 94.3,48.675 94.3,40.7 94.5,40.5 94.5,39.2 93.725,38.425 90.825,38.425 ; 90.1,36.95 90.1,37.7 90.825,38.425 ; U107.2@90.825,39.725 90.825,38.425
M8+: Q43,46.1 U2.25 U108.4 | length 21.3
  Top Layer w0.254: 104,36.95 v1(104.65,36.95) ; U108.4@104.15,39.7 v1(104.7,39.7) 105.85,40.85 105.85,44.15 112.45,50.75 U2.25@112.45,53.875
  Bottom Layer w0.254: v1(104.65,36.95) v1@104.65,39.65
M8-: Q43,46.3 U2.26 U108.2 | length 24.1
  Top Layer w0.254: 102.1,36.95 102.1,37.7 102.825,38.425 ; U108.2@102.825,39.725 102.825,38.425 ; U2.26@112.95,53.875 112.95,50.3 106.6,43.95 106.6,39.9 105.125,38.425 102.825,38.425